# Altium PCB pcb.PcbDoc
Units mm, origin at the board's own origin, x right, y up, seen from the top; angles counter-clockwise.
Board outline 39 x 21 mm, 4 copper layers (Top Copper, 2, 3, Bottom Copper), stack 1.535 mm thick; 18 components, 25 nets, 119 pads, 87 vias.
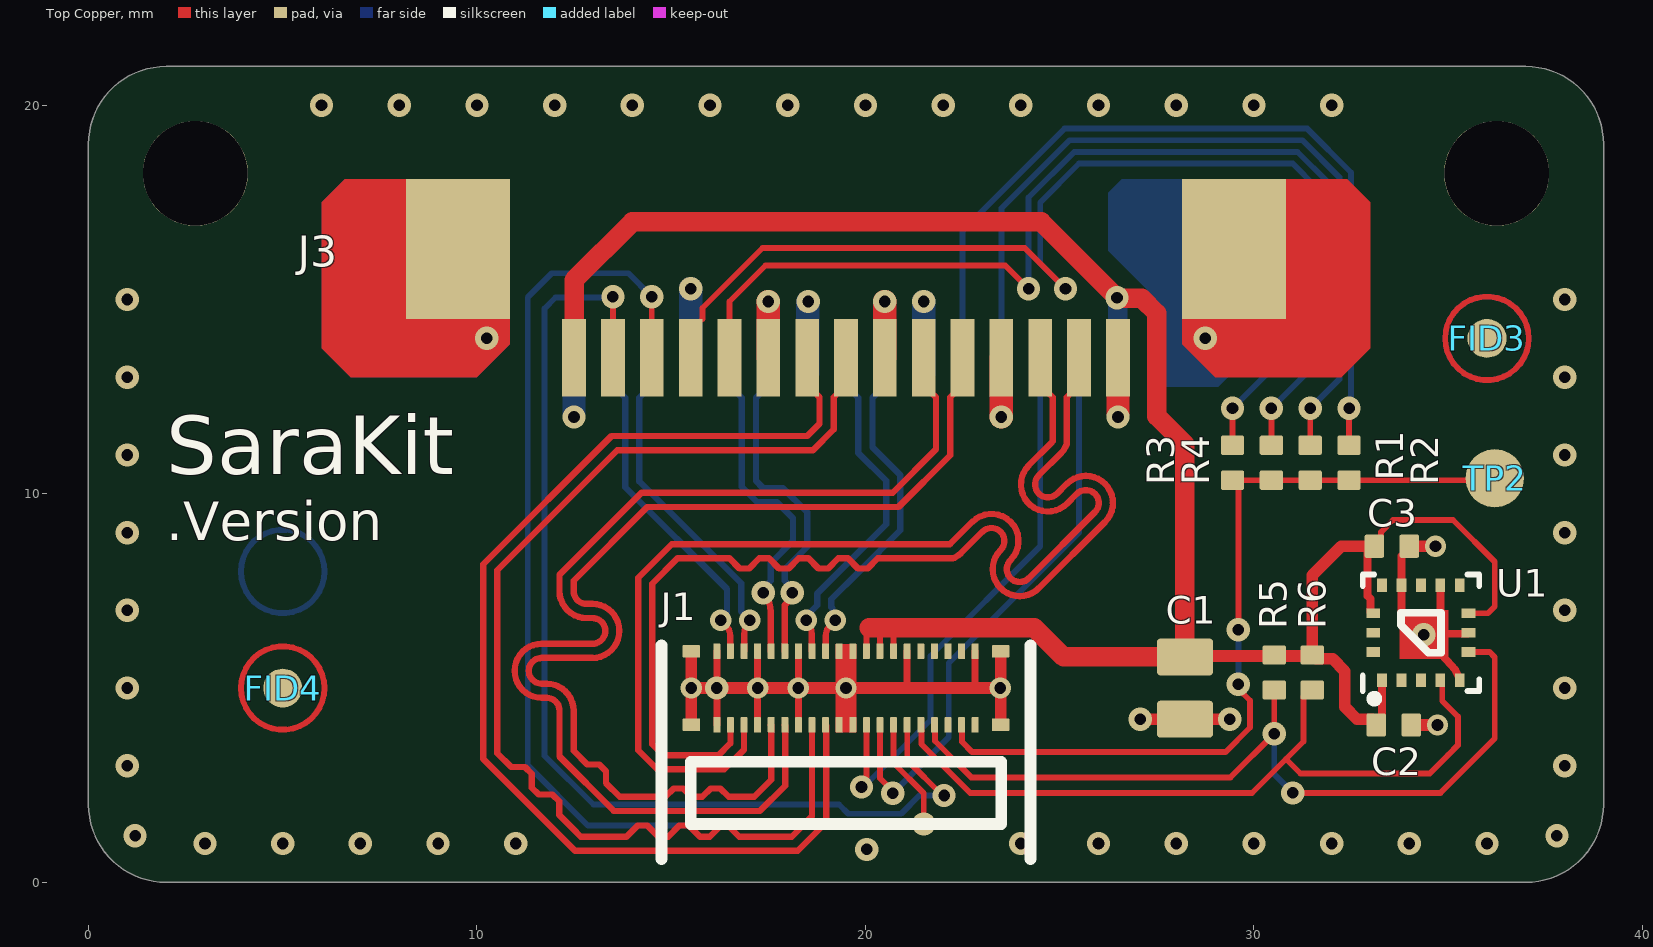
[diagram p0: Top Copper view]
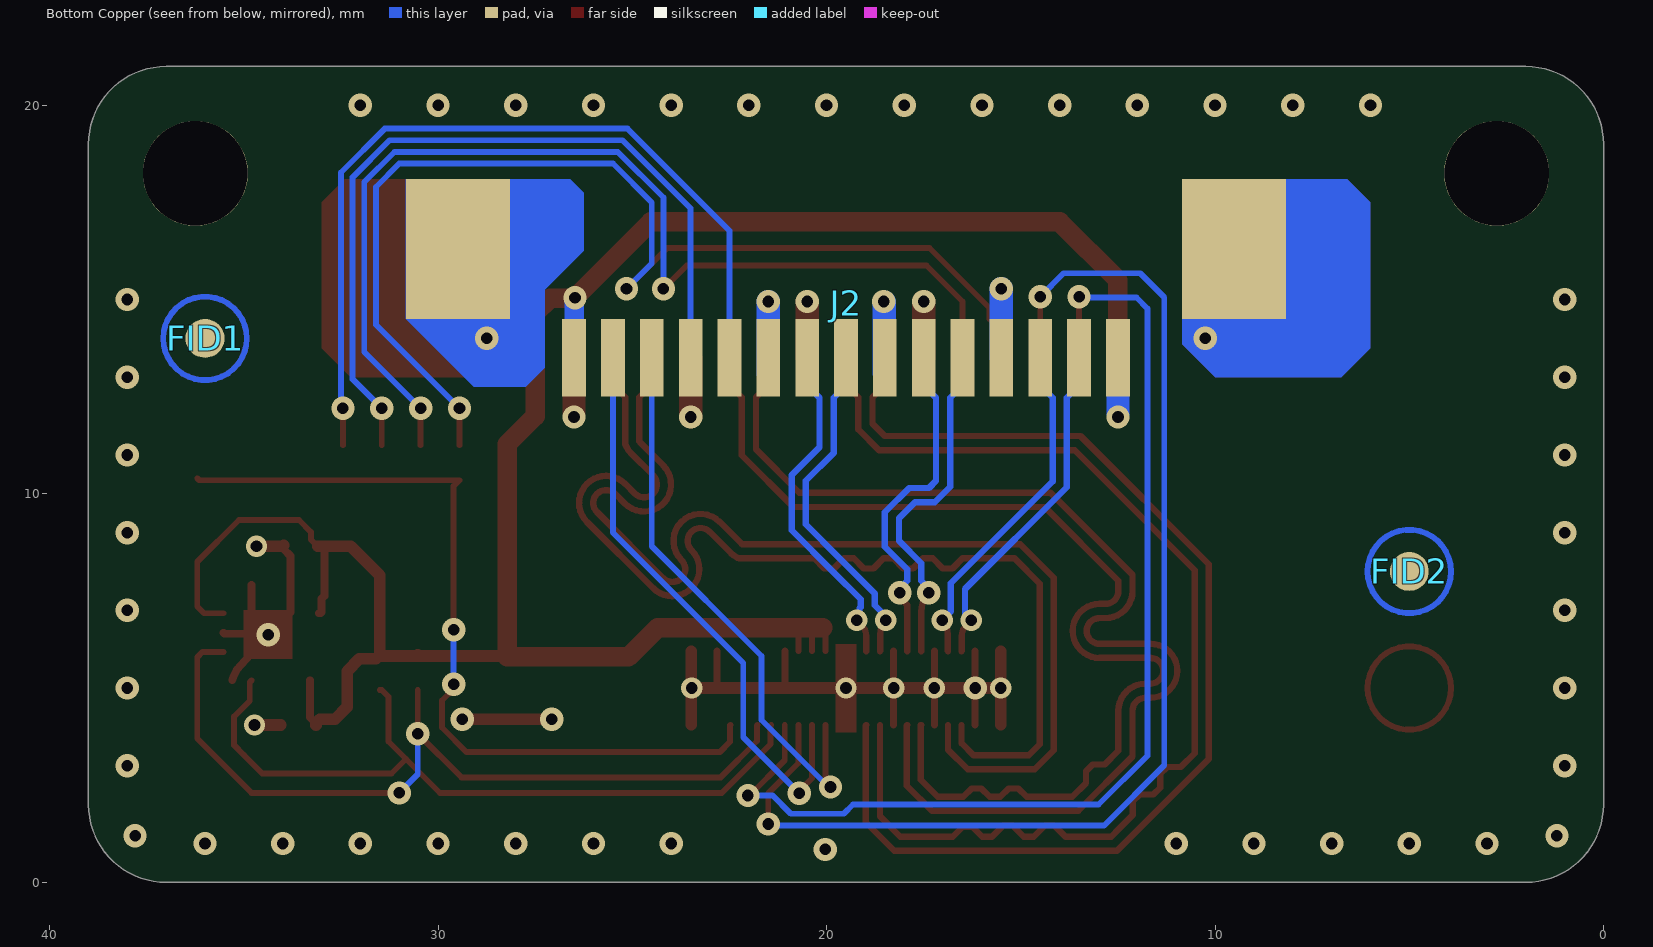
[diagram p1: Bottom Copper view, seen from below]
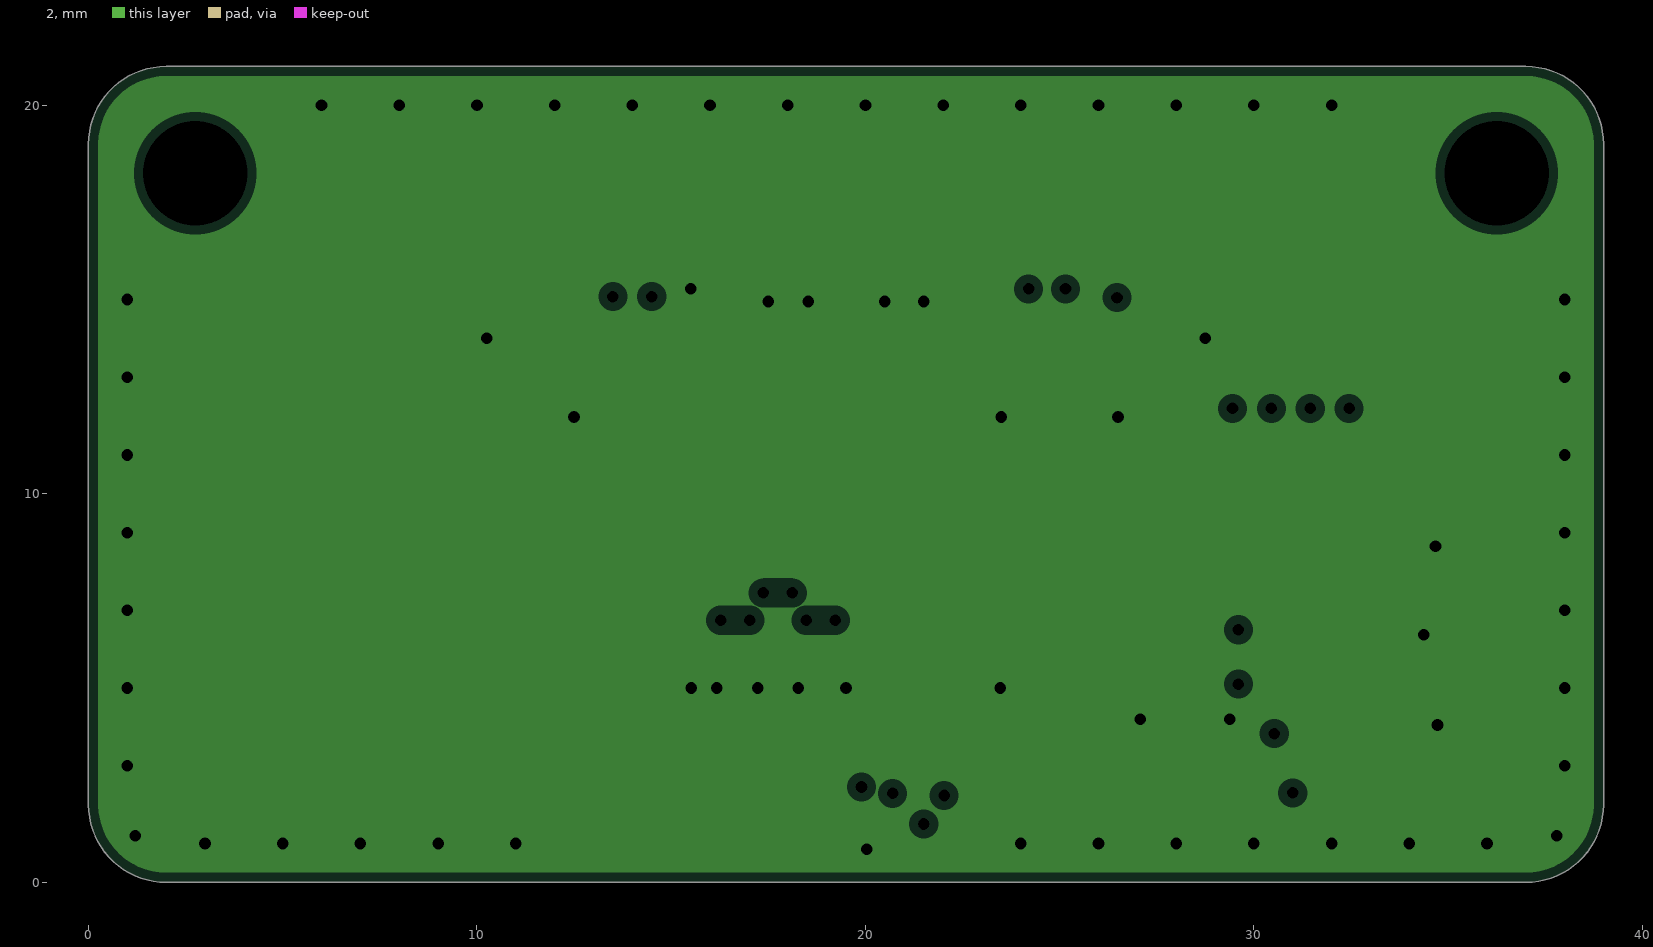
[diagram p2: 2, clearances drawn from the general rule]
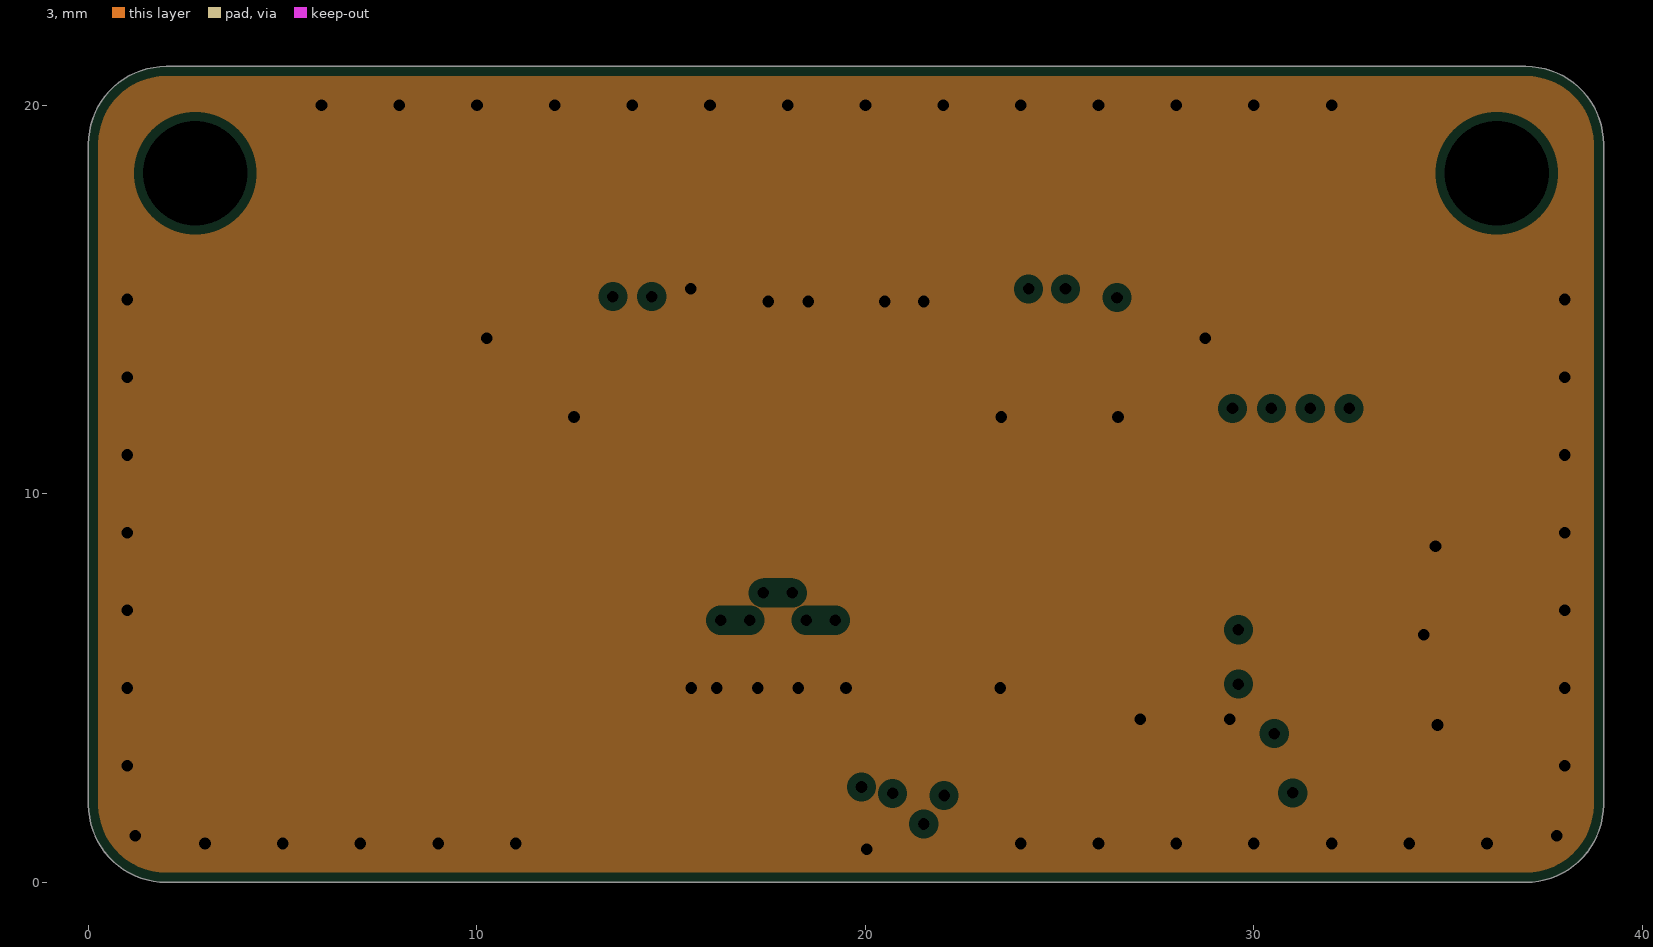
[diagram p3: 3, clearances drawn from the general rule]
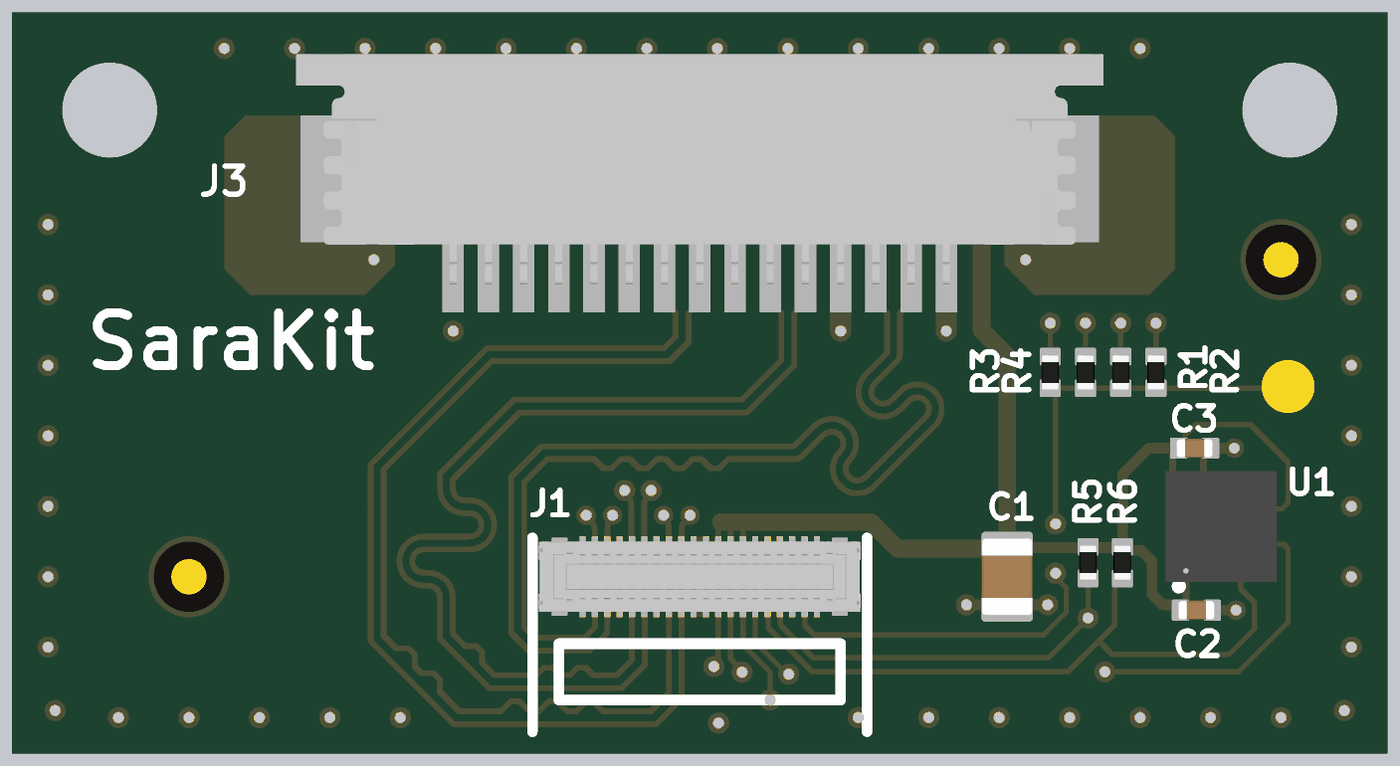
[diagram p4: 3D render of the assembled board from above, using the file's embedded part models]

## Layer stack, top to bottom
Top Solder: solder mask 0.0102, Solder Resist, Dk 3.5
Top Copper: signal copper 0.0356
Dielectric 1: prepreg 0.122, FR-4, Dk 4.2
2: plane copper 0.035, net GND
Dielectric 2: dielectric 1.15, FR-4, Dk 4.2
3: plane copper 0.035, net GND
Dielectric 3: prepreg 0.122, FR-4, Dk 4.2
Bottom Copper: signal copper 0.0356
Bottom Solder: solder mask 0.0102, Solder Resist, Dk 3.5

## Board outline
2,0 cw(c2,2) 0,2 0,19 cw(c2,19) 2,21 37,21 cw(c37,19) 39,19 39,2 cw(c37,2) 37,0

## Design rules (kind name [scope] priority, off if disabled: settings)
BoardOutlineClearance [All] p1: gap=0.4 ignorepadtopadclearanceinfootprint=FALSE
Clearance Clearance_DiffPair [InDifferentialPairClass('100ohm_diff') vs InPoly AND OnOutside] p1: gap=1 ignorepadtopadclearanceinfootprint=TRUE
Clearance Clearance_PolyOuter [InPoly vs OnOutside] p2: gap=0.2 ignorepadtopadclearanceinfootprint=FALSE except(0.275: Arc-Hole Track-Hole SMDPad-Hole THPad-Hole Via-Hole Fill-Hole Poly-Hole Region-Hole Text-Hole)
Clearance [All] p3: gap=0.15 ignorepadtopadclearanceinfootprint=FALSE except(0.3: Arc-Hole Track-Hole SMDPad-Hole THPad-Hole Via-Hole Fill-Hole Poly-Hole Region-Hole Text-Hole)
ComponentClearance [All] p1: gap=0 collisioncheckmode=3 verticalgap=0 showdistances=FALSE
DiffPairsRouting [InDifferentialPairClass('100ohm_diff')] p1: maxlimit=0.2 minlimit=0.2 mostfreqgap=0.2 toplayer_minwidth=0.164 toplayer_maxwidth=0.164 toplayer_prefwidth=0.164 bottomlayer_minwidth=0.164 bottomlayer_maxwidth=0.164 bottomlayer_prefwidth=0.164 impedanceprofiledriven=TRUE impedanceprofileid={C5705A5F-F2F3-4A79-AF42-7DD4629A5BC7} impedanceprofilevalue=100.000000 maxuncoupledlength=12.7
MatchedLengths InterPairSkew_CAM0 [InDifferentialPairClass('CAM0_diff')] p1: tolerance=25.4 checknetsindiffpair=FALSE checkdiffpairvsdiffpair=TRUE checkxsignals=TRUE checkothers=TRUE usedelayunits=TRUE delaytolerance=25.000000
MatchedLengths IntraPairSkew_CAM0 [InDifferentialPairClass('CAM0_diff')] p2: tolerance=25.4 checknetsindiffpair=TRUE checkdiffpairvsdiffpair=FALSE checkxsignals=FALSE checkothers=FALSE usedelayunits=TRUE delaytolerance=10.000000
MatchedLengths IntraPairSkew_CAM1 [InDifferentialPairClass('CAM1_diff')] p3: tolerance=25.4 checknetsindiffpair=TRUE checkdiffpairvsdiffpair=FALSE checkxsignals=FALSE checkothers=FALSE usedelayunits=TRUE delaytolerance=10.000000
MatchedLengths InterPairSkew_CAM1 [InDifferentialPairClass('CAM1_diff')] p4: tolerance=25.4 checknetsindiffpair=FALSE checkdiffpairvsdiffpair=TRUE checkxsignals=TRUE checkothers=TRUE usedelayunits=TRUE delaytolerance=25.000000
PlaneClearance [All] p1: clearance=0.225
PlaneConnect [All] p1: planeconnectstyle=Direct reliefexpansion=0.508 reliefentries=4 reliefconductorwidth=0.254 reliefairgap=0.254
PolygonConnect [All] p1: thpad.connectstyle=Relief thpad.reliefconductorwidth=0.254 thpad.reliefentries=4 thpad.polygonreliefangle="90 Angle" thpad.airgapwidth=0.254 smdpad.connectstyle=Direct smdpad.reliefconductorwidth=0.254 smdpad.reliefentries=4 smdpad.polygonreliefangle="90 Angle" smdpad.airgapwidth=0.254 via.connectstyle=Direct via.reliefconductorwidth=0.254 via.reliefentries=4 via.polygonreliefangle="90 Angle" via.airgapwidth=0.254
RoutingVias [All] p1: holewidth=0.3 width=0.6 viastyle="Through Hole" minholewidth=0.3 minwidth=0.55 maxholewidth=0.3 maxwidth=0.6
SilkToSilkClearance [All] p1: silktosilkclearance=0
SilkToSolderMaskClearance [IsPad] p1: minsilkscreentomaskgap=0.1 clearancetoexposedcopper=TRUE
SolderMaskExpansion SolderMaskExpansion_Vias [IsVia] p1: expansion=0.102 istentingtop=TRUE
SolderMaskExpansion [All] p2: expansion=0 istentingtop=FALSE
Width [All] p1: maxlimit=1 minlimit=0.15 preferedwidth=0.2
24 further rules are at their usual default settings.

## Classes and differential pairs
differential pair class CAM0_diff: CAM1_CLK CAM1_D0 CAM1_D1
differential pair class CAM1_diff: CAM0_CLK CAM0_D0 CAM0_D1
differential pair class 100ohm_diff: CAM0_CLK CAM0_D0 CAM0_D1 CAM1_CLK CAM1_D0 CAM1_D1
differential pair CAM1_D1: +CAM0_D1_P -CAM0_D1_N
differential pair CAM1_D0: +CAM0_D0_P -CAM0_D0_N
differential pair CAM1_CLK: +CAM0_CLK_P -CAM0_CLK_N
differential pair CAM0_D1: +CAM1_D1_P -CAM1_D1_N
differential pair CAM0_D0: +CAM1_D0_P -CAM1_D0_N
differential pair CAM0_CLK: +CAM1_CLK_P -CAM1_CLK_N

## Components (designator, comment, footprint, x,y, rotation, side; value= is the part's Value field where it differs from the comment)
C1 "CL21A226MOQNNNE" CAPC2013X145L 28.225,5 r90 top
C2 "CL05A105KO5NNNC" CAPC1005X60L 33.6,4.05 r180 top
C3 "CL05A105KO5NNNC" CAPC1005X60L 33.55,8.65 r180 top
FID1 "FIDUCIAL" "FIDUCIAL 2MM" 36,14 r180 bottom
FID2 "FIDUCIAL" "FIDUCIAL 2MM" 5,8 r180 bottom
FID3 "FIDUCIAL" "FIDUCIAL 2MM" 36,14 r0 top
FID4 "FIDUCIAL" "FIDUCIAL 2MM" 5,5 r0 top
J1 "5046184012" "MOLEX 5046184012" 19.5,5 r180 top
J2 "1-84952-5" "TE 1-84952-5" 19.5,17.3 r180 bottom locked
J3 "1-84952-5" "TE 1-84952-5" 19.5,17.3 r0 top locked
R1 "RC0402JR-070RL" RESC1005X40L 31.45,10.8 r90 top
R2 "RC0402JR-070RL" RESC1005X40L 32.45,10.8 r90 top
R3 "RC0402JR-070RL" RESC1005X40L 29.45,10.8 r90 top
R4 "RC0402JR-070RL" RESC1005X40L 30.45,10.8 r90 top
R5 "RC0402FR-0710KL" RESC1005X40L 30.525,5.4 r90 top
R6 "RC0402FR-0710KL" RESC1005X40L 31.5,5.4 r90 top
TP2 "TESTPAD" "TP 1.5mm" 36.2,10.4 r0 top
U1 "LIS3DH" LGA16R50P5X3_300X300X100 34.3,6.425 r90 top

## Footprints (in the part's own frame and the unit in brackets; to place one, negate y for a bottom-side part, rotate by r counter-clockwise, add the part's x,y. Pads: shape width x height; smd on the part's side, far side on the other; paste and mask are expansions set on the pad)
CAPC1005X60L [mm] "Capacitor,non-polarized,Chip;1.025mm L X 0.525mm W X 0.60mm H, EIA 0402, METRIC 1005"
  rrect20% 0.5x0.6 smd: 1(-0.45,0) 2(0.45,0)
  body extent -0.52,-0.27 0.53,0.28, height 0.55
CAPC2013X145L [mm] "Capacitor,non-polarized,Chip;2.00mm L X 1.25mm W X 1.45mm H, EIA 0805, METRIC 2013"
  rrect20% 0.95x1.45 smd: 1(-0.8,0) 2(0.8,0)
  body extent -1.1,-0.72 1.1,0.73, height 1.45
"FIDUCIAL 2MM" [mm]
  round 1 smd paste-0.5 mask+0.5: 0(0,0)
  Top Copper circle w0.15: c0,0 r1.075
LGA16R50P5X3_300X300X100 [mm] "LGA, 16- Leads, Body 3,00x3,00mm, Pitch 0,50mm, IPC High Density"
  rect 0.35x0.25 smd: 1(-1.225,1) 2(-1.225,0.5) 3(-1.225,0) 4(-1.225,-0.5) 5(-1.225,-1) 9(1.225,-1) 10(1.225,-0.5) 11(1.225,0) 12(1.225,0.5) 13(1.225,1)
  rect 0.25x0.35 smd: 6(-0.5,-1.225) 7(0,-1.225) 8(0.5,-1.225) 14(0.5,1.225) 15(0,1.225) 16(-0.5,1.225)
  silkscreen extent -1.8,-1.5 1.5,1.5, body extent -1.57,-1.57 1.57,1.57, height 0.99
"MOLEX 5046184012" [mm]
  rrect20% 0.18x0.4 smd paste-0.01: 1(-3.325,-0.95) 2(-3.325,0.95) 3(-2.975,-0.95) 4(-2.975,0.95) 5(-2.625,-0.95) 6(-2.625,0.95) 7(-2.275,-0.95) 8(-2.275,0.95) 9(-1.925,-0.95) 10(-1.925,0.95) 11(-1.575,-0.95) 12(-1.575,0.95) 13(-1.225,-0.95) 14(-1.225,0.95) 15(-0.875,-0.95) 16(-0.875,0.95) 17(-0.525,-0.95) 18(-0.525,0.95) 19(-0.175,-0.95) 20(-0.175,0.95) 21(0.175,-0.95) 22(0.175,0.95) 23(0.525,-0.95) 24(0.525,0.95) 25(0.875,-0.95) 26(0.875,0.95) 27(1.225,-0.95) 28(1.225,0.95) 29(1.575,-0.95) 30(1.575,0.95) 31(1.925,-0.95) 32(1.925,0.95) 33(2.275,-0.95) 34(2.275,0.95) 35(2.625,-0.95) 36(2.625,0.95) 37(2.975,-0.95) 38(2.975,0.95) 39(3.325,-0.95) 40(3.325,0.95)
  rrect20% 0.455x0.33 smd: MNT1(-3.98,-0.945) MNT2(-3.98,0.945) MNT3(3.98,-0.945) MNT4(3.98,0.945)
  body extent -4.57,-1 4.58,1, height 0.58
RESC1005X40L [mm] "Resistor,Chip;1.00mm L X 0.50mm W X 0.40mm H, EIA 0402, METRIC 1005"
  rrect20% 0.5x0.6 smd: 1(-0.45,0) 2(0.45,0)
  body extent -0.5,-0.25 0.5,0.25, height 0.4
"TE 1-84952-5" [mm]
  rect 0.61x2 smd: 1(-7,-3.8) 2(-6,-3.8) 3(-5,-3.8) 4(-4,-3.8) 5(-3,-3.8) 6(-2,-3.8) 7(-1,-3.8) 8(0,-3.8) 9(1,-3.8) 10(2,-3.8) 11(3,-3.8) 12(4,-3.8) 13(5,-3.8) 14(6,-3.8) 15(7,-3.8)
  rect 2.68x3.6 smd: MNT1(9.99,-1) MNT2(-9.99,-1)
  body extent -11.46,-4 11.46,2.54, height 2.56
"TP 1.5mm" [mm] "1.2mm testpad"
  round 1.5 smd paste-3: 1(0,0)
  body extent -0.75,-0.75 0.75,0.75, height 0.01

## Part data
C1: library part 81, "SMT 0805c 22uF 16V 20% X5R 1.6MHz 85'C", 03 Manufacturer=Samsung, 07 Package=0805c, 00 Index=81, 01 Name="CAPACITOR CERAMIC CL21A226MOQNNNE Samsung", 02 MPN=CL21A226MOQNNNE, 04 Main Group=CAPACITOR, 05 Sub Group=CERAMIC, 06 Assembly=SMT, 08 Parameter 1=22uF, 09 Parameter 2=16V, 10 Parameter 3=20%, 11 Parameter 4=X5R, 12 Parameter 5=1.6MHz, 13 Parameter 6=85'C, 14 Modification Date=16.11.2020, ComponentLink1Description=DATASHEET, ComponentLink1URL="E:\Praca\Mindsailors\Mindsailors Altium\Database Library\Datasheets\CAPACITOR\Samsung CL21A226MOQNNN.pdf"
C2 C3: library part 155, "SMT 0402c 1uF 16V 10% X5R 11.9MHz 85'C", 03 Manufacturer=Samsung, 07 Package=0402c, 00 Index=155, 01 Name="CAPACITOR THICK FILM CL05A105KO5NNNC Samsung", 02 MPN=CL05A105KO5NNNC, 04 Main Group=CAPACITOR, 05 Sub Group="THICK FILM", 06 Assembly=SMT, 08 Parameter 1=1uF, 09 Parameter 2=16V, 10 Parameter 3=10%, 11 Parameter 4=X5R, 12 Parameter 5=11.9MHz, 13 Parameter 6=85'C, 14 Modification Date=16.11.2020, ComponentLink1Description=DATASHEET, ComponentLink1URL="E:\Praca\Mindsailors\Mindsailors Altium\Database Library\Datasheets\CAPACITOR\Samsung CL05A105KO5NNN.pdf"
FID1 FID2 FID3 FID4: library part 487, 00 Index=487, 01 Name=FIDUCIAL, 02 MPN=FIDUCIAL, 14 Modification Date=23.02.2021, Fotprint Directory=fot_other/, Library Directory=sym_basics/
J1: library part 509, "SMT 2x20 0.35mm Straight 50V 0.3A", 03 Manufacturer=Molex, 00 Index=509, 01 Name="CONNECTOR PCB 5046184012 Molex", 02 MPN=5046184012, 04 Main Group=CONNECTOR, 05 Sub Group=PCB, 06 Assembly=SMT, 08 Parameter 1=2x20, 09 Parameter 2=0.35mm, 11 Parameter 4=Straight, 12 Parameter 5=50V, 13 Parameter 6=0.3A, 14 Modification Date=18.03.2021, ComponentLink1Description=DATASHEET, ComponentLink1URL=https://www.molex.com/molex/products/part-detail/pcb_receptacles/5046183012
J2 J3: library part 1028, "SMT 1x15 1mm Bottom Contact Right Angle 200VAC 1A", 03 Manufacturer="TE Connectivity", 00 Index=1028, 01 Name="CONNECTOR PCB 1-84952-5 TE Connectivity", 02 MPN=1-84952-5, 04 Main Group=CONNECTOR, 05 Sub Group=PCB, 06 Assembly=SMT, 08 Parameter 1=1x15, 09 Parameter 2=1mm, 10 Parameter 3="Bottom Contact", 11 Parameter 4="Right Angle", 12 Parameter 5=200VAC, 13 Parameter 6=1A, 14 Modification Date=22.06.2022, ComponentLink1Description=DATASHEET, ComponentLink1URL=https://www.te.com/usa-en/product-1-84952-5.html, Fotprint Directory=fot_other/, Library Directory=sym_basics/
R1 R2 R3 R4: library part 14, "SMT 0402c 0R 5% 62.5mW 200ppm/K 50V", 03 Manufacturer=Yageo, 07 Package=0402c, 00 Index=14, 01 Name="RESISTOR THICK FILM RC0402JR-070RL Yageo", 02 MPN=RC0402JR-070RL, 04 Main Group=RESISTOR, 05 Sub Group="THICK FILM", 06 Assembly=SMT, 08 Parameter 1=0R, 09 Parameter 2=5%, 10 Parameter 3=62.5mW, 11 Parameter 4=200ppm/K, 12 Parameter 5=50V, 14 Modification Date=16.11.2020, ComponentLink1Description=DATASHEET, ComponentLink1URL="E:\Praca\Mindsailors\Mindsailors Altium\Database Library\Datasheets\RESISTOR\Yageo RC_L Series.pdf"
R5 R6: library part 15, "SMT 0402c 10k 1% 62.5mW 100ppm/K 50V", 03 Manufacturer=Yageo, 07 Package=0402c, 00 Index=15, 01 Name="RESISTOR THICK FILM RC0402FR-0710KL Yageo", 02 MPN=RC0402FR-0710KL, 04 Main Group=RESISTOR, 05 Sub Group="THICK FILM", 06 Assembly=SMT, 08 Parameter 1=10k, 09 Parameter 2=1%, 10 Parameter 3=62.5mW, 11 Parameter 4=100ppm/K, 12 Parameter 5=50V, 14 Modification Date=16.11.2020, ComponentLink1Description=DATASHEET, ComponentLink1URL="E:\Praca\Mindsailors\Mindsailors Altium\Database Library\Datasheets\RESISTOR\Yageo RC_L Series.pdf", Fotprint Directory=fot_ipc/, Library Directory=sym_basics/
TP2: library part 10, 00 Index=10, 01 Name="PCB COMPONENT TESTPAD TESTPAD", 02 MPN=TESTPAD, 04 Main Group="PCB COMPONENT", 05 Sub Group=TESTPAD, 14 Modification Date=16.11.2020
U1: library part 158, "SMT LGA-16 ACCELEROMETER 1.71V - 3.6V +/- 16g", 03 Manufacturer=STMicroelectronics, 07 Package=LGA-16, 00 Index=158, 01 Name="IC SENSOR LIS3DH STMicroelectronics", 02 MPN=LIS3DH, 04 Main Group=IC, 05 Sub Group=SENSOR, 06 Assembly=SMT, 08 Parameter 1=ACCELEROMETER, 11 Parameter 4="1.71V - 3.6V", 12 Parameter 5="+/- 16g", 14 Modification Date=18.12.2020, ComponentLink1Description=DATASHEET, ComponentLink1URL="E:\Praca\Mindsailors\Mindsailors Altium\Database Library\Datasheets\IC\ST lis3dh.pdf"

## Free pads (board coordinates)
  round 2.7 hole 2.7 unplated paste+0 mask+0: M2.5(2.75,18.25) M2.5(36.25,18.25)

## Via types
v1: diameter 0.6, hole 0.3, Top Copper to Bottom Copper, tented both sides, 76 vias
v2: diameter 0.55, hole 0.3, Top Copper to Bottom Copper, tented both sides, 11 vias

## Nets (pads, with @x,y where several pads share a name; then routed paths per layer and width w, separated by ;. In a path a pad name is that pad's centre, name@x,y a point inside that pad or via, vN(x,y) a via of type N, cw(c..) or ccw(c..) an arc to the next point about the centre after c; other vN are vias at no path point)
3.3V: C1.2 C2.2 C3.2 J1.13 J1.15 J1.17 J2.1 J3.1 R5.2 R6.2 U1.1 U1.8 U1.14 | length 59.2
  Top Copper w0.15: J1.17 20.025,6.475 ; J1.15 20.375,6.475 ; J1.13 20.725,6.475 ; C3.2 33.275,8.825 33.275,9.018 33.582,9.325 35.125,9.325 36.2,8.25 36.2,7.1 36.025,6.925 U1.8
  Top Copper w0.2: C3.2@32.925,8.65 32.925,7.371 33,7.296 33,6.95 33.025,6.925 U1.14 ; C2.2@33.145,4.044 C2.2 ; C2.2@33.15,4.1 33.3,4.25 U1.1
  Top Copper w0.3: C1.2 28.25,5.825 R5.2@30.525,5.825 ; R5.2 R5.2@30.525,5.825 ; C3.2 32.925,8.65 32.25,8.65 31.5,7.9 R6.2 ; C2.2@33.145,4.044 33.145,4.105 33.05,4.2 32.655,4.2 32.341,4.513 32.341,5.436 32.028,5.75 31.6,5.75 R6.2 ; R5.2@30.525,5.825 31.475,5.825 R6.2
  Top Copper w0.5: J3.1@12.5,13.099 12.5,15.5 14,17 24.525,17 26.494,15.031 27.117,15.031 27.5,14.648 27.5,12 28.225,11.275 C1.2 25.1,5.8 24.35,6.55 20.1,6.55
  Bottom Copper w0.5: J2.1@26.5,13.099 26.5,14.998 26.494,15.004 26.494,15.019 v1@26.5,15.025
  other v1: 26.475,15.05
CAM0_CLK_N: J1.25 J2.8 | length 8.9
  Top Copper w0.164: v2(18.475,6.743) cw(c18.129,6.397) 18.618,6.397 18.618,5.957 J1.25
  Bottom Copper w0.164: v2(18.475,6.743) 18.475,6.848 18.759,7.131 18.759,7.434 19.687,8.362 20.536,9.211 20.536,10.332 19.818,11.05 19.818,12.473 19.661,12.63 19.568,12.63 19.5,12.699 J2.8
CAM0_CLK_P: J1.23 J2.7 | length 8.9
  Top Copper w0.164: J1.23 18.982,5.957 18.982,6.35 cw(c19.344,6.35) 19.088,6.606 v2(19.225,6.743)
  Bottom Copper w0.164: v2(19.225,6.743) 19.151,6.817 19.151,7.051 19.122,7.08 19.122,7.283 19.837,7.998 20.9,9.061 20.9,10.482 20.182,11.201 20.182,12.473 20.339,12.63 20.432,12.63 20.5,12.699 J2.7
CAM0_D0_N: J1.37 J2.14 | length 9
  Top Copper w0.164: v2(16.275,6.743) 16.412,6.606 cw(c16.156,6.35) 16.518,6.35 16.518,5.957 J1.37
  Bottom Copper w0.164: J2.14 13.5,12.699 13.568,12.63 13.661,12.63 13.818,12.473 13.818,10.168 16.436,7.549 16.436,6.905 v2(16.275,6.743)
CAM0_D0_P: J1.35 J2.13 | length 9
  Top Copper w0.164: J1.35 16.882,5.957 16.882,6.397 cw(c17.371,6.397) v2(17.025,6.743)
  Bottom Copper w0.164: J2.13 14.5,12.699 14.432,12.63 14.339,12.63 14.182,12.473 14.182,10.318 16.8,7.7 16.8,6.968 v2(17.025,6.743)
CAM0_D1_N: J1.31 J2.11 | length 8.9
  Top Copper w0.164: v1@17.365,7.443 cw(c16.892,6.97) 17.561,6.97 17.561,6.591 J1.31@17.561,5.95
  Bottom Copper w0.164: J2.11 16.5,12.699 16.568,12.63 16.661,12.63 16.818,12.473 16.818,10.182 17.214,9.786 17.724,9.786 18.136,9.374 18.136,8.787 17.561,8.212 17.561,7.761 17.382,7.582 v1@17.382,7.45
  other v1: 17.368,7.45
CAM0_D1_P: J1.29 J2.10 | length 9
  Top Copper w0.164: J1.29 17.925,6.441 17.925,6.97 17.925,7.088 17.925,7.139 18.121,7.335 v1@18.121,7.443
  Bottom Copper w0.164: J2.10 17.5,12.699 17.432,12.63 17.339,12.63 17.182,12.473 17.182,10.332 17.364,10.15 17.875,10.15 18.5,9.525 18.5,8.636 17.925,8.061 17.925,7.761 18.105,7.582 v1@18.105,7.45
  other v1: 18.118,7.45
CAM1_CLK_N: J1.26 J3.8 | length 29.6
  Top Copper w0.164: J1.26 18.625,1.695 18.105,1.175 17.25,1.175 16.75,1.175 16.495,1.43 16.245,1.43 15.991,1.175 15.741,1.175 15.455,1.46 15.205,1.46 14.92,1.175 14.67,1.175 14.385,1.46 14.135,1.46 13.85,1.175 13.35,1.175 12.675,1.175 12.473,1.377 12.12,1.73 12.12,2.084 11.943,2.261 11.589,2.261 11.413,2.437 11.413,2.791 11.236,2.968 10.882,2.968 10.525,3.325 10.525,3.547 10.525,8.036 13.614,11.125 18.65,11.125 19.182,11.657 19.182,12.487 19.325,12.63 19.432,12.63 19.5,12.699 J3.8
CAM1_CLK_P: J1.24 J3.7 | length 29.7
  Top Copper w0.164: J3.7 18.5,12.699 18.568,12.63 18.675,12.63 18.818,12.487 18.818,11.807 18.499,11.489 13.464,11.489 10.161,8.186 10.161,3.174 12.524,0.811 18.256,0.811 18.989,1.544 18.989,4.036 J1.24
CAM1_D0_N: J1.38 J3.14 | length 29.5
  Top Copper w0.164: J1.38 16.525,3.575 16.219,3.269 14.795,3.269 14.514,3.551 14.514,7.689 15.161,8.336 16.1,8.336 16.5,8.336 16.758,8.078 17.008,8.078 17.267,8.336 17.517,8.336 17.775,8.078 18.025,8.078 18.284,8.336 18.534,8.336 18.792,8.078 19.042,8.078 19.3,8.336 19.55,8.336 19.809,8.078 20.059,8.078 20.317,8.336 21.35,8.336 21.954,8.336 22.216,8.336 ccw(c22.217,8.518) 22.301,8.357 ccw(c21.979,8.973) 22.47,8.481 ; 22.47,8.481 23.011,9.022 cw(c23.245,8.787) 23.48,8.553 ccw(c23.972,8.061) 23.48,7.569 ccw(c23.972,8.061) 24.464,7.57 26.167,9.273 ccw(c25.676,9.765) 26.167,10.257 ccw(c25.676,9.765) 25.183,10.256 ; 25.183,10.256 24.933,10.005 cw(c24.698,10.24) 24.463,10.474 25.033,11.044 ccw(c24.542,11.536) 25.163,11.223 ccw(c25,11.304) 25.182,11.305 25.182,11.568 25.182,12.487 25.325,12.63 25.432,12.63 25.5,12.699 J3.14
CAM1_D0_P: J1.36 J3.13 | length 29.8
  Top Copper w0.164: J1.36 16.875,3.411 16.369,2.905 14.645,2.905 14.15,3.4 14.15,7.839 15.011,8.7 21.954,8.7 22.167,8.7 ccw(c21.979,8.973) 22.213,8.738 22.754,9.279 cw(c23.245,8.787) 23.738,8.296 ; 23.737,7.826 ccw(c23.972,8.061) 24.207,7.827 25.91,9.53 ccw(c25.676,9.765) 25.911,9.999 ; 23.737,7.827 cw(c23.972,8.061) 23.737,8.295 ; J3.13 24.5,12.699 24.568,12.63 24.675,12.63 24.818,12.487 24.818,11.568 24.818,11.353 cw(c24.542,11.536) 24.777,11.302 24.206,10.731 ccw(c24.698,10.24) 25.19,9.748 25.442,10 cw(c25.676,9.765) 25.91,10
CAM1_D1_N: J1.32 J3.11 | length 29.2
  Top Copper w0.164: J1.32@17.561,4.05 J1.32 17.575,2.639 17.136,2.2 16.982,2.2 16.482,2.2 16.267,2.415 16.017,2.415 15.802,2.2 15.527,2.2 15.312,2.415 15.062,2.415 14.846,2.2 13.675,2.2 13.321,2.554 13.321,2.856 13.145,3.033 12.842,3.033 12.489,3.386 12.489,3.565 12.489,4.416 ccw(c11.793,4.416) 11.793,5.111 11.666,5.111 cw(c11.666,5.443) 11.334,5.443 cw(c11.666,5.443) 11.666,5.775 12.972,5.775 ccw(c12.972,6.47) 13.667,6.47 ccw(c12.972,6.47) 12.972,7.166 12.82,7.166 cw(c12.82,7.497) 12.489,7.497 12.489,7.761 12.489,7.764 14.386,9.661 20.851,9.661 22.182,10.993 22.182,12.487 22.325,12.63 22.432,12.63 22.5,12.699 J3.11
CAM1_D1_P: J1.30 J3.10 | length 29.8
  Top Copper w0.164: J1.30 17.939,4.036 17.939,2.489 17.286,1.836 15.15,1.836 13.524,1.836 12.125,3.236 12.125,3.565 12.125,4.416 ccw(c11.793,4.416) 11.793,4.748 11.666,4.748 cw(c11.666,5.443) 10.971,5.443 cw(c11.666,5.443) 11.666,6.139 12.972,6.139 ccw(c12.972,6.47) 13.303,6.47 ccw(c12.972,6.47) 12.972,6.802 12.82,6.802 cw(c12.82,7.497) 12.125,7.497 12.125,7.761 12.125,7.914 14.236,10.025 20.7,10.025 21.818,11.143 21.818,12.487 21.675,12.63 21.568,12.63 21.5,12.699 J3.10
CAMERA_GPIO: J1.4 R1.1 R2.1 R3.1 R4.1 TP2.1 | length 21.6
  Top Copper w0.15: J1.4 22.485,4.04 22.485,3.615 22.75,3.35 29.267,3.35 29.9,3.983 29.9,4.678 29.6,4.978 v1(29.6,5.1) ; v1(29.6,6.5) 29.6,10.2 R3.1 R4.1 R1.1 R2.1 36.15,10.35 TP2.1
  Bottom Copper w0.15: v1(29.6,5.1) v1(29.6,6.5)
GND: C1.1 C2.1 C3.1 J1.1 J1.11 J1.19 J1.20 J1.21 J1.22 J1.27 J1.28 J1.33 J1.34 J1.39 J1.40 J1.MNT1 J1.MNT2 J1.MNT3 J1.MNT4 J2.6 J2.9 J2.12 J2.15 J2.MNT1 J2.MNT2 J3.6 J3.9 J3.12 J3.15 J3.MNT1 J3.MNT2 U1.5 U1.7 U1.10 U1.12 | length 42.1
  Top Copper w0.18: J1.40 v1(16.175,5) J1.39 ; J1.34 v2(17.225,5) 17.225,5.545 J1.33 ; J1.28 v2(18.275,5) J1.27 ; 21.075,5 J1.11 ; 22.825,5 J1.1
  Top Copper w0.2: C3.1@33.975,8.675 33.975,8.575 33.8,8.4 U1.12 33.8,6.95 v1(34.375,6.375) ; U1.10 34.8,6.908 34.375,6.483 v1(34.375,6.375) ; U1.5 35.275,5.275 35.175,5.479 v1(34.375,6.375) ; U1.7 35.5,6.4 34.4,6.4 v1(34.375,6.375)
  Top Copper w0.3: J1.MNT4 v2(15.52,5) J1.MNT3 ; v2@15.525,5 v1(16.175,5) v2(17.225,5) v2(18.275,5) v2(19.5,5) 21.075,5 v2@23.48,5 ; J1.MNT2 v2@23.48,5 ; J1.MNT1 v2@23.48,5 ; v1(27.075,4.2) C1.1 v1(29.375,4.2) ; C3.1@33.975,8.675 C3.1 v2(34.675,8.65) ; C2.1 v2(34.725,4.05)
  Top Copper w0.6: J3.6 v1(17.5,14.95) ; J3.9 v1(20.5,14.95) ; v1(23.5,11.975) J3.12 ; v1@26.5,12.075 J3.15
  Bottom Copper w0.3: J2.9@18.5,13.099 J2.9@18.513,13.111 ; v1@18.513,14.938 v1(18.525,14.95)
  Bottom Copper w0.6: v1@12.5,12.075 J2.15@12.5,13.099 ; J2.12 v1(15.5,15.275) ; J2.9@18.513,13.111 v1@18.513,14.938 ; J2.6@21.5,13.099 v1(21.5,14.95)
  other v1: 20.035,0.846 3,1 5,1 7,1 9,1 11,1 24,1 26,1 28,1 30,1 32,1 34,1 36,1 1.2,1.2 37.8,1.2 1,3 38,3 1,5 38,5 1,7 38,7 1,9 38,9 1,11 38,11 12.5,11.975 26.5,11.975 1,13 38,13 10.25,14 28.75,14 1,15 38,15 6,20 8,20 10,20 12,20 14,20 16,20 18,20 20,20 22,20 24,20 26,20 28,20 30,20 32,20
  other v2: 23.475,5
ID_SC: J1.18 J2.3 | length 14.6
  Top Copper w0.15: v1(19.9,2.453) 19.9,2.575 20.025,2.7 J1.18
  Bottom Copper w0.15: v1(19.9,2.453) 19.953,2.453 21.676,4.176 21.676,5.825 24.5,8.649 J2.3
ID_SD: J1.16 J2.2 | length 15.1
  Top Copper w0.15: J1.16 20.375,2.676 20.701,2.349 v1(20.701,2.289)
  Bottom Copper w0.15: v1(20.701,2.289) 22.144,3.731 22.144,5.644 25.5,9 J2.2
MOT_ACC_SCL: J1.10 R6.1 U1.4 | length 19.6
  Top Copper w0.15: J1.10 21.44,4.035 21.44,3.56 22.7,2.3 29.95,2.3 30.825,3.175 ; R6.1 31.45,4.95 31.275,4.775 31.275,3.625 30.825,3.175 ; U1.4 34.85,5.15 34.85,4.667 35.25,4.267 35.25,3.525 35,3.275 34.525,2.8 31.2,2.8 30.825,3.175
MOT_ACC_SDA: J1.8 R5.1 U1.6 | length 21.5
  Top Copper w0.15: J1.8 21.79,4.035 21.79,3.634 22.724,2.7 29.4,2.7 v1(30.525,3.825) R5.1 ; v1(31,2.3) 34.8,2.3 36.2,3.7 36.2,5.793 36.068,5.925 U1.6
  Bottom Copper w0.15: v1(30.525,3.825) 30.525,2.78 31,2.305 v1(31,2.3)
NetJ2_4: J2.4 R1.2 | length 20.9
  Top Copper w0.15: R1.2 v1(31.45,12.2)
  Bottom Copper w0.15: J2.4 23.5,17.349 25.251,19.1 31.249,19.1 32.2,18.149 32.2,12.95 v1(31.45,12.2)
NetJ2_5: J2.5 R2.2 | length 21.9
  Top Copper w0.15: R2.2 v1(32.45,12.2)
  Bottom Copper w0.15: J2.5 22.5,16.773 25.127,19.4 31.373,19.4 32.5,18.273 32.5,12.25 v1(32.45,12.2)
NetJ3_4: J3.4 R3.2 | length 29.6
  Top Copper w0.15: J3.4 15.5,14.195 15.805,14.5 15.805,14.78 17.35,16.325 24.1,16.325 v1(25.15,15.275) ; R3.2 v1(29.45,12.2)
  Bottom Copper w0.15: v1(25.15,15.275) 24.5,15.925 24.5,17.5 25.5,18.5 31,18.5 31.6,17.9 31.6,14.35 v1(29.45,12.2)
NetJ3_5: J3.5 R4.2 | length 28
  Top Copper w0.15: J3.5 16.5,14.95 17.425,15.875 23.6,15.875 v1(24.2,15.275) ; R4.2 v1(30.45,12.2)
  Bottom Copper w0.15: v1(24.2,15.275) 24.2,17.624 25.376,18.8 31.124,18.8 31.9,18.024 31.9,13.65 v1(30.45,12.2)
SCL0: J1.14 J3.3 | length 31
  Top Copper w0.15: J3.3 v1(14.5,15.075) ; J1.14 20.725,3.067 21.5,2.292 v1(21.5,1.5)
  Bottom Copper w0.15: v1(14.5,15.075) 13.9,15.675 11.925,15.675 11.306,15.056 11.306,3.012 12.855,1.464 21.464,1.464 v1(21.5,1.5)
SDA0: J1.12 J3.2 | length 28.3
  Top Copper w0.15: J3.2 v1(13.5,15.075) ; J1.12 21.075,3.142 21.984,2.233 v1(22.025,2.233)
  Bottom Copper w0.15: v1(13.5,15.075) 13.475,15.05 12.025,15.05 11.741,14.766 11.741,3.259 13,2 19.32,2 19.556,1.764 20.919,1.764 21.388,2.233 v1(22.025,2.233)
pads on no net: FID1.0 FID2.0 FID3.0 FID4.0 J1.2 J1.3 J1.5 J1.6 J1.7 J1.9 U1.2 U1.3 U1.9 U1.11 U1.13 U1.15 U1.16

## Polygon pours and split planes (outlines as drawn)
GND on 2 (split plane): 37.171,20.741 37.341,20.716 37.508,20.674 37.67,20.616 37.825,20.543 37.972,20.455 38.11,20.352 38.237,20.237 38.352,20.11 38.455,19.972 38.543,19.825 38.616,19.67 38.674,19.508 38.716,19.341 38.741,19.171 38.749,19.01 38.748,19 38.748,2 38.749,1.99 38.741,1.829 38.716,1.659 38.674,1.492 38.616,1.33 38.543,1.175 38.455,1.028 38.352,0.89 38.237,0.763 38.11,0.648 37.972,0.545 37.825,0.457 37.67,0.384 37.508,0.326 37.341,0.284 37.171,0.259 37.01,0.251 37,0.252 2,0.252 1.99,0.251 1.829,0.259 1.659,0.284 1.492,0.326 1.33,0.384 1.175,0.457 1.028,0.545 0.89,0.648 0.763,0.763 0.648,0.89 0.545,1.028 0.457,1.175 0.384,1.33 0.326,1.492 0.284,1.659 0.259,1.829 0.251,1.99 0.252,2 0.252,19 0.251,19.01 0.259,19.171 0.284,19.341 0.326,19.508 0.384,19.67 0.457,19.825 0.545,19.972 0.648,20.11 0.763,20.237 0.89,20.352 1.028,20.455 1.175,20.543 1.33,20.616 1.492,20.674 1.659,20.716 1.829,20.741 1.99,20.749 2,20.748 37,20.748 37.01,20.749
GND on 3 (split plane): 37.171,20.741 37.341,20.716 37.508,20.674 37.67,20.616 37.825,20.543 37.972,20.455 38.11,20.352 38.237,20.237 38.352,20.11 38.455,19.972 38.543,19.825 38.616,19.67 38.674,19.508 38.716,19.341 38.741,19.171 38.749,19.01 38.748,19 38.748,2 38.749,1.99 38.741,1.829 38.716,1.659 38.674,1.492 38.616,1.33 38.543,1.175 38.455,1.028 38.352,0.89 38.237,0.763 38.11,0.648 37.972,0.545 37.825,0.457 37.67,0.384 37.508,0.326 37.341,0.284 37.171,0.259 37.01,0.251 37,0.252 2,0.252 1.99,0.251 1.829,0.259 1.659,0.284 1.492,0.326 1.33,0.384 1.175,0.457 1.028,0.545 0.89,0.648 0.763,0.763 0.648,0.89 0.545,1.028 0.457,1.175 0.384,1.33 0.326,1.492 0.284,1.659 0.259,1.829 0.251,1.99 0.252,2 0.252,19 0.251,19.01 0.259,19.171 0.284,19.341 0.326,19.508 0.384,19.67 0.457,19.825 0.545,19.972 0.648,20.11 0.763,20.237 0.89,20.352 1.028,20.455 1.175,20.543 1.33,20.616 1.492,20.674 1.659,20.716 1.829,20.741 1.99,20.749 2,20.748 37,20.748 37.01,20.749

## Other copper
Top Copper:
  region net GND: 10.85,18.1 6.6,18.1 6,17.5 6,13.75 6.75,13 10,13 10.85,13.85
  region net GND: 28.15,18.1 32.4,18.1 33,17.5 33,13.75 32.25,13 29,13 28.15,13.85
  region net GND: 33.75,7 35,7 35,5.75 33.75,5.75
  pour cut-out: 22.925,4.25 22.925,5.75 16.075,5.75 16.075,4.25
  pour cut-out: 33.475,5.6 33.475,4.825 32.95,4.825 32.949,5.6
  pour cut-out: 33.246,6.75 32.7,6.75 32.7,7.275 32.701,7.276 33.247,7.276
  pour cut-out: 35.2,7.275 35.804,7.275 35.804,6.1 35.2,6.1
  region net GND: 19.765,3.868 19.235,3.868 19.235,6.132 19.765,6.132
Bottom Copper:
  region net GND: 30.83,18.1 30.83,14.5 29.08,12.75 27.75,12.75 27.25,13.25 27.25,15.25 26.25,16.25 26.25,17.75 26.6,18.1 28.15,18.1
  region net GND: 10.85,18.1 6.6,18.1 6,17.5 6,13.75 6.75,13 10,13 10.85,13.85
2 (plane layer: these items are gaps in the copper):
  pour cut-out: 18.475,7.118 19.225,7.118 19.225,6.368 18.475,6.368
  pour cut-out: 16.275,7.118 17.025,7.118 17.025,6.368 16.275,6.368
  pour cut-out: 17.375,7.825 18.125,7.825 18.125,7.075 17.375,7.075
3 (plane layer: these items are gaps in the copper):
  pour cut-out: 17.375,7.825 18.125,7.825 18.125,7.075 17.375,7.075
  pour cut-out: 16.275,7.118 17.025,7.118 17.025,6.368 16.275,6.368
  pour cut-out: 18.475,7.118 19.225,7.118 19.225,6.368 18.475,6.368
Multi-Layer:
  pour cut-out: 2.75,15.5 cw(c2.75,18.25) 0,18.25 cw(c2.75,18.25) 2.75,21 cw(c2.75,18.25) 5.5,18.25 cw(c2.75,18.25)
  pour cut-out: 36.25,15.5 cw(c36.25,18.25) 33.5,18.25 cw(c36.25,18.25) 36.25,21 cw(c36.25,18.25) 39,18.25 cw(c36.25,18.25)

## Silkscreen, mask and mechanical layers (free items; w line width, h text height)
Top Overlay:
  lines w0.3: 14.75,0.6 14.75,6.1 ; 24.25,0.6 24.25,6.1 ; 15.5,1.5 15.5,3.1 23.5,3.1 23.5,1.5 15.5,1.5
  text "SaraKit" at 2,10.5 h1.5
  text ".Version" at 2,8.8 h1
Mechanical 1:
  drawing of 487 lines, arcs and shapes, not listed
Fab Notes:
  lines w0.381: 96.588,112.808 107,112.808 130.616,112.808 152.454,112.808 168.959,112.808 183.434,112.808 ; 96.588,115.856 107,115.856 130.616,115.856 152.454,115.856 168.959,115.856 183.434,115.856 ; 96.588,118.904 107,118.904 130.616,118.904 152.454,118.904 168.959,118.904 183.434,118.904 ; 96.588,121.952 107,121.952 130.616,121.952 152.454,121.952 168.959,121.952 183.434,121.952 ; 96.588,125 107,125 130.616,125 152.454,125 168.959,125 183.434,125 ; 96.588,128.048 107,128.048 130.616,128.048 152.454,128.048 168.959,128.048 183.434,128.048 ; 96.588,131.096 107,131.096 130.616,131.096 152.454,131.096 168.959,131.096 183.434,131.096 ; 96.588,134.144 107,134.144 130.616,134.144 152.454,134.144 168.959,134.144 183.434,134.144 ; 96.588,137.192 107,137.192 130.616,137.192 152.454,137.192 168.959,137.192 183.434,137.192 ; 96.588,140.24 107,140.24 130.616,140.24 152.454,140.24 168.959,140.24 183.434,140.24 ; 96.588,143.288 183.434,143.288 ; 107,146.336 107,109.76 ; 130.616,146.336 130.616,109.76 ; 152.454,146.336 152.454,109.76 ; 168.959,146.336 168.959,109.76 ; 107,109.76 96.588,109.76 96.588,146.336 183.434,146.336 183.434,109.76 168.959,109.76 ; 107,109.76 130.616,109.76 ; 130.616,109.76 152.454,109.76 ; 152.454,109.76 168.959,109.76
  text ".Project_Code" at 43.4,145.808 h2
  text "Layer" at 98.366,144.05 h1.52
  text "Name" at 108.778,144.05 h1.52
  text "Material" at 132.394,144.05 h1.52
  text "Thickness" at 154.232,144.05 h1.52
  text "Constant" at 170.737,144.05 h1.52
  text "SaraAI LLC" at 43.4,141.808 h2
  text "Top Overlay" at 108.778,141.002 h1.52
  text "Date:" at 43.2,138.308 h1
  text ".ModifiedDate" at 48.2,138.308 h1
  text "Top Solder" at 108.778,137.954 h1.52
  text "Solder Resist" at 132.394,137.954 h1.52
  text "0,010mm" at 154.232,137.954 h1.52
  text "3.5" at 170.737,137.954 h1.52
  text "Version:" at 43.2,136.308 h1
  text ".Version" at 51.2,136.308 h1
  text "1.55mm/1.71mm" at 63.2,135.308 h1
  text "1" at 98.366,134.906 h1.52
  text "Top Copper" at 108.778,134.906 h1.52
  text "0,036mm" at 154.232,134.906 h1.52
  text "Laminate" at 43,132.658 h1.5
  text "Dielectric 1" at 108.778,131.858 h1.52
  text "FR-4" at 132.394,131.858 h1.52
  text "0,122mm" at 154.232,131.858 h1.52
  text "4.2" at 170.737,131.858 h1.52
  text "Material:" at 43.2,131.308 h1
  text "FR4 compilant with RoHs requirements" at 51.95,130.884 h1
  text "Nom./Max. thickness:" at 43.2,129.308 h1
  text "2" at 98.366,128.81 h1.52
  text "2" at 108.778,128.81 h1.52
  text "CF-004" at 132.394,128.81 h1.52
  text "0,035mm" at 154.232,128.81 h1.52
  text "CTI:" at 43.2,127.308 h1
  text ">=175" at 47.2,127.308 h1
  text "Dielectric 2" at 108.778,125.762 h1.52
  text "FR-4" at 132.394,125.762 h1.52
  text "1,150mm" at 154.232,125.762 h1.52
  text "4.2" at 170.737,125.762 h1.52
  text "TG:" at 43.2,125.308 h1
  text ">=150" at 46.2,125.308 h1
  text "TD:" at 43.2,123.308 h1
  text ">=340" at 46.2,123.308 h1
  text "3" at 98.366,122.714 h1.52
  text "3" at 108.778,122.714 h1.52
  text "CF-004" at 132.394,122.714 h1.52
  text "0,035mm" at 154.232,122.714 h1.52
  text "Dielectric 3" at 108.778,119.666 h1.52
  text "FR-4" at 132.394,119.666 h1.52
  text "0,122mm" at 154.232,119.666 h1.52
  text "4.2" at 170.737,119.666 h1.52
  text "Finish" at 43,118.658 h1.5
  text "Soldermask:" at 43.2,117.308 h1
  text "MATTE BLACK" at 54.2,117.308 h1
  text "4" at 98.366,116.618 h1.52
  text "Bottom Copper" at 108.778,116.618 h1.52
  text "0,036mm" at 154.232,116.618 h1.52
  text "Silkscreen:" at 43.2,115.308 h1
  text "WHITE" at 54.2,115.308 h1
  text "Bottom Solder" at 108.778,113.57 h1.52
  text "Solder Resist" at 132.394,113.57 h1.52
  text "0,010mm" at 154.232,113.57 h1.52
  text "3.5" at 170.737,113.57 h1.52
  text "Cu finish:" at 43.2,113.308 h1
  text "Che Ni/Au selective (ENIG)" at 53.2,113.308 h1
  text "Bottom Overlay" at 108.778,110.522 h1.52
  text "The solder mask expansion equals 0mm. The manufacturer is allowed to increase the opening in accordance with production tolerances." at 43,105.928 h1
  text "Gerber Files Description" at 43.3,100.308 h1.5
  text "Layers related to the assembly are not included by default in the package generated for the laminate manufacturer." at 43,93.928 h1
  text ".GTL - Top Layer (no. 1) (copper)" at 43.15,91.474 h1
  text ".Gn .GPn - Inner Layer (no. n) (copper)" at 43.15,89.474 h1
  text ".GBL - Bottom Layer (copper)" at 43.15,87.474 h1
  text ".GTO - Top Overlay" at 43.15,84.474 h1
  text ".GBO - Bottom Overlay" at 43.15,82.474 h1
  text ".GTS - Top Solder Mask" at 43.15,79.474 h1
  text ".GBS - Bottom Solder Mask" at 43.15,77.308 h1
  text ".GTP - Top Paste" at 43.15,74.474 h1
  text ".GBP - Bottom Paste" at 43.15,72.308 h1
  text ".GM2 - Fab Notes" at 43.15,69.308 h1
  text ".GM3 - Board outline" at 43.15,67.308 h1
  text ".GM7 - Internal Milling Outline" at 43.15,65.474 h1
  text ".GM11 - Top Assembly Information" at 43.15,62.474 h1
  text ".GM12 - Bottom Assembly Information" at 43.15,60.474 h1
  text ".GM15 - Top Courtyard" at 43.15,57.474 h1
  text ".GM16 - Bottom Courtyard" at 43.15,55.474 h1
  text ".GM17 - Top Impedance Matching" at 43.15,52.474 h1
  text ".GM18 - Bottom Impedance Matching" at 43.15,50.474 h1
  text "Impedance matching" at 43,43.7 h1.5
  text "The traces that require impedance matching are marked on layers 17 (TOP) and 18 (BOTTOM) /  / 1. Differential 100ohm / Width 0.1635mm  / Spacing 0.2mm" at 43,29.945 h1
Board Shape:
  the board outline again, w0.05
Drill Drawing:
  circle w0.254: c95,11.5 r0.847
  lines w0.254: 94.153,6.843 95.847,6.843 95.847,8.537 94.153,8.537 94.153,6.843
  lines w0.381: 92.635,5.7 445.544,5.7 ; 92.635,13.32 445.544,13.32 ; 106.627,1.89 106.627,17.13 ; 120.339,1.89 120.339,17.13 ; 150.049,1.89 150.049,17.13 ; 162.898,1.89 162.898,17.13 ; 181.536,1.89 181.536,17.13 ; 222.672,1.89 222.672,17.13 ; 237.654,1.89 237.654,17.13 ; 256.597,1.89 256.597,17.13 ; 298.495,1.89 298.495,17.13 ; 320.18,1.89 320.18,17.13 ; 354.054,1.89 354.054,17.13 ; 387.928,1.89 387.928,17.13 ; 409.918,1.89 409.918,17.13 ; 92.635,1.89 445.544,1.89 445.544,17.13 92.635,17.13 92.635,1.89
  text "Symbol" at 94.921,14.463 h1.83
  text "Count" at 107.77,14.463 h1.83
  text "Hole Size" at 121.482,14.463 h1.83
  text "Plated" at 151.192,14.463 h1.83
  text "Hole Type" at 164.041,14.463 h1.83
  text "Drill Layer Pair" at 182.679,14.463 h1.83
  text "Via/Pad" at 223.815,14.463 h1.83
  text "Pad Shape" at 238.797,14.463 h1.83
  text "Template" at 257.74,14.463 h1.83
  text "Description" at 299.638,14.463 h1.83
  text "Hole Tolerance (+)" at 321.323,14.463 h1.83
  text "Hole Tolerance (-)" at 355.197,14.463 h1.83
  text "Hole Length" at 389.071,14.463 h1.83
  text "Routed Path Length" at 411.061,14.463 h1.83
  text "2" at 107.77,10.653 h1.52
  text "2,700mm (106,30mil)" at 121.482,10.653 h1.52
  text "NPTH" at 151.192,10.653 h1.52
  text "Round" at 164.041,10.653 h1.52
  text "Top Copper - Bottom Copper" at 182.679,10.653 h1.52
  text "Pad" at 223.815,10.653 h1.52
  text "Rounded" at 238.797,10.653 h1.52
  text "c270hn270m270p270(Tol10-10)" at 257.74,10.653 h1.52
  text "0,100mm (3,94mil)" at 321.323,10.653 h1.52
  text "0,100mm (3,94mil)" at 355.197,10.653 h1.52
  text "-" at 389.071,10.653 h1.52
  text "-" at 411.061,10.653 h1.52
  text "87" at 107.77,6.843 h1.52
  text "0,300mm (11,81mil)" at 121.482,6.843 h1.52
  text "PTH" at 151.192,6.843 h1.52
  text "Round" at 164.041,6.843 h1.52
  text "Top Copper - Bottom Copper" at 182.679,6.843 h1.52
  text "Via" at 223.815,6.843 h1.52
  text "Rounded" at 238.797,6.843 h1.52
  text "(Mixed)" at 257.74,6.843 h1.52
  text "-" at 389.071,6.843 h1.52
  text "-" at 411.061,6.843 h1.52
  text "89 Total" at 107.77,3.033 h1.52
Top Impedance (Mech17):
  drawing of 248 lines, arcs and shapes, not listed
Bottom Impedance (Mech18):
  lines w0.164: 13.498,13.498 13.498,12.697 13.567,12.629 13.66,12.629 13.817,12.471 13.817,10.166 16.435,7.548 16.435,6.903 16.273,6.741 ; 14.498,13.498 14.498,12.697 14.43,12.629 14.337,12.629 14.18,12.471 14.18,10.317 16.798,7.698 16.798,6.966 17.023,6.741 ; 16.498,13.498 16.498,12.697 16.567,12.629 16.66,12.629 16.817,12.471 16.817,10.18 17.212,9.785 17.723,9.785 18.135,9.373 18.135,8.785 17.56,8.21 17.56,7.76 17.38,7.58 17.38,7.448 ; 17.498,13.498 17.498,12.697 17.43,12.629 17.337,12.629 17.18,12.471 17.18,10.331 17.363,10.148 17.873,10.148 18.498,9.523 18.498,8.635 17.923,8.06 17.923,7.76 18.103,7.58 18.103,7.448 ; 18.473,6.741 18.473,6.846 18.757,7.13 18.757,7.432 19.685,8.36 ; 19.223,6.741 19.15,6.815 19.15,7.05 19.121,7.078 19.121,7.282 19.836,7.997 ; 19.498,13.498 19.498,12.697 19.567,12.629 19.66,12.629 19.817,12.471 19.817,11.048 20.535,10.33 20.535,9.21 19.685,8.36 ; 20.498,13.498 20.498,12.697 20.43,12.629 20.337,12.629 20.18,12.471 20.18,11.199 20.898,10.481 20.898,9.059 19.836,7.997 ; 19.685,8.36 19.685,8.36 ; 19.836,7.997 19.836,7.997

## Dimensions
2,21 to 2,0 on Fab Notes
39,2 to 0,2 on Fab Notes

## Text inside footprints (layer, text, board x,y; h text height)
J1: Restricted Area "Coper prohibited area" at 21.516,5.067 h0.2 r180
TP2: Top Courtyard "GKS-100" at 36.025,11.365 h0.05